# Altium PCB ZYNQ7020_AD9364.PcbDoc (part 2 of 3)
Units mil, origin at the board's own origin, x right, y up, seen from the top; angles counter-clockwise.
Board outline 6000 x 4000 mil, 4 copper layers (Top Layer, Layer 1, Layer 2, Bottom Layer), stack 13.912 mil thick; 188 components, 275 nets, 1212 pads, 269 vias.
Unrouted connection lines stored in the file: 735.
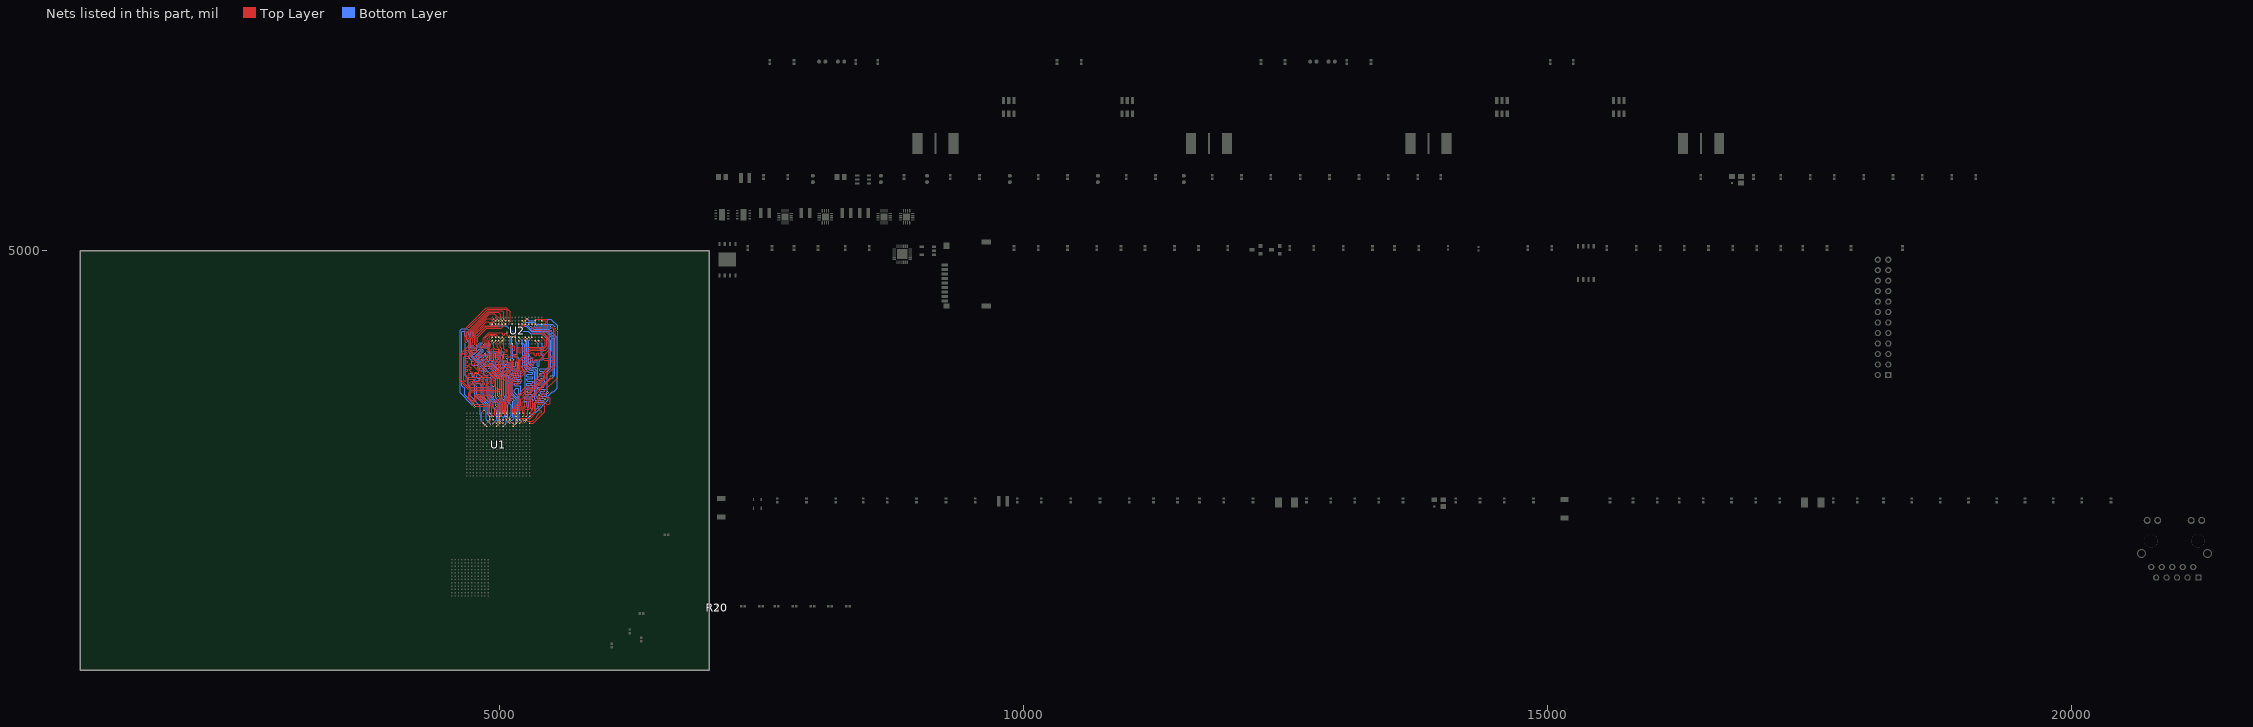
[diagram p3: the nets of this part, all layers, seen from the top]

## Via types
v1: diameter 17.72, hole 7.87, Top Layer to Bottom Layer, tented both sides, 129 vias
v2: diameter 16, hole 10, Top Layer to Bottom Layer, 124 vias
v3: diameter 19.68, hole 11.81, Top Layer to Bottom Layer, 16 vias

## Nets (pads, with @x,y where several pads share a name; then routed paths per layer and width w, separated by ;. In a path a pad name is that pad's centre, name@x,y a point inside that pad or via, vN(x,y) a via of type N, cw(c..) or ccw(c..) an arc to the next point about the centre after c; other vN are vias at no path point) (continued)
DDR3_A0: U1.N2 U2.N3 | length 1612.3
  Top Layer w6: v2(4763.34,3514.71) 4764.33,3515.7 4878.5,3515.7 4894.26,3502.54 4894.26,3434.54 U1.N2@4908.13,3419.29 ; v2(4783.92,4188.85) 4868.56,4273.49 4997.5,4273.49 5027.03,4303.02 5025.06,4303.02 v2(5011.28,4316.8)
  Bottom Layer w6: v2@4764.33,3517.66 4764.33,3532.43 4667.87,3628.88 4667.87,3686.78 4642.18,3712.47 4642.18,4228.22 4646.12,4232.15 4662.85,4232.15 4668.76,4226.25 4668.76,4190.82 4672.7,4186.88 4681.55,4186.88 4687.46,4192.78 4687.46,4221.33 4693.37,4227.23 4703.21,4227.23 4708.13,4222.31 4708.13,4192.78 4714.03,4186.88 4723.88,4186.88 4728.8,4191.8 4728.8,4221.33 4733.72,4226.25 4746.52,4226.25 4749.47,4223.3 4749.47,4194.75 4756.36,4187.86 v2@4781.95,4187.86
DDR3_A1: U1.K2 U2.P7 | length 1564.4
  Top Layer w6: v2(4888.23,3879.21) 4877.4,3879.21 4853.78,3855.59 4853.78,3828.03 4850.83,3825.08 4835.08,3825.08 4828.19,3831.97 4828.19,3854.6 4861.65,3888.07 4861.65,3897.91 4855.75,3903.82 4843.94,3903.82 4811.46,3871.34 4802.6,3871.34 4794.73,3879.21 4794.73,3888.07 4827.21,3920.55 4827.21,3932.36 4821.3,3938.27 4811.46,3938.27 4780.95,3907.75 4770.12,3907.75 4762.25,3915.63 4762.25,3922.52 4791.77,3952.05 4791.77,3961.89 4786.85,3966.81 4776.03,3966.81 4753.39,3944.17 4741.58,3944.17 4734.69,3951.06 4734.69,3960.9 4768.15,3994.37 4784.88,3994.37 4819.33,4028.82 4819.33,4091.81 4823.27,4095.75 4853.78,4095.75 4867.56,4109.53 4867.56,4169.57 4902.01,4204.01 4966.97,4204.01 v2(5011.26,4159.72) ; U1.K2@5003.09,3419.29 5019.25,3435.45 5019.25,3614.12 v2(5004.48,3628.88)
  Bottom Layer w6: v2(4888.23,3879.21) 4918.74,3879.21 5004.37,3793.58 5004.37,3732.34 5004.48,3732.23 v2(5004.48,3628.88) ; v2(5011.26,4159.72) v2@5011.26,4160.71
DDR3_A2: U1.M3 U2.P3 | length 1620.5
  Top Layer w6: 4711.08,3810.89 4709.11,3808.93 ; v2@4714.03,3833.53 4714.03,3813.85 4709.11,3808.93 ; v2(4924.63,3402.29) 4939.29,3387.63 U1.M3@4939.65,3387.63 ; v2(4979.78,4316.8) 4993.56,4303.02 4995.53,4303.02 4976.83,4284.32 4853.8,4284.32 4762.26,4192.78 4762.26,4184.91 4778.01,4169.16 4778.01,4106.17 4789.82,4094.36 4789.82,4080.58 4782.93,4073.69 4762.26,4073.69 4758.33,4069.75 4758.33,4056.96 4761.28,4054 4778.01,4054 4782.93,4049.08 4782.93,4036.29 4779.98,4033.34 4762.26,4033.34 4702.22,3973.3 4679.59,3973.3 4672.7,3966.41 4672.7,3957.55 4678.6,3951.64 4693.37,3951.64 4698.29,3946.72 4698.29,3936.88 4692.38,3930.97 4679.59,3930.97 4672.7,3924.08 4672.7,3915.23 4677.62,3910.3 4691.4,3910.3 4697.3,3904.4 4697.3,3894.56 4691.4,3888.65 4677.62,3888.65 4672.7,3883.73 4672.7,3873.89 4677.62,3868.97 4692.38,3868.97 4697.3,3864.04 4697.3,3853.22 4693.37,3849.28 4677.62,3849.28 4672.7,3844.36 4672.7,3819.75 4683.52,3808.93 4709.11,3808.93
  Bottom Layer w6: v2@4718.96,3831.56 4734.7,3831.56 4739.63,3826.64 4739.63,3802.04 4743.56,3798.1 4754.39,3798.1 4760.29,3804 4760.29,3828.61 4765.22,3833.53 4794.74,3833.53 4844.94,3783.34 4844.94,3737.96 4844.9,3737.92 4844.9,3608 4908.88,3544.03 4908.88,3448.55 4925.61,3431.82 v2@4925.61,3403.28
  other v2: 4714.03,3832.55
DDR3_A3: U1.K3 U2.N2 | length 1674
  Top Layer w6: v2(4943.36,3713.34) 4942.37,3713.34 4913.83,3684.8 4698.28,3684.8 4627.41,3755.67 4627.41,4013.54 4713.04,4099.17 4713.04,4153.31 4702.21,4164.13 4702.21,4212.36 4903.99,4414.13 4988.63,4414.13 5011.27,4391.49 v2@5011.27,4349.17 ; v2(4944.31,3617.84) 4948.25,3613.91 4948.25,3559.77 4988.13,3521.32 4988.13,3404.32 U1.K3@5002.95,3387.63 ; v2(5010.38,4349.3) 5011.14,4349.3 v2@5011.27,4349.17 ; U2.N2@5027.02,4334.41 5012.25,4349.17 v2@5011.27,4349.17
  Bottom Layer w6: v2(4943.36,3713.34) 4943.36,3618.8 v2(4944.31,3617.84) ; v2@5009.3,4350.38 v2(5010.38,4349.3) v2@5011.27,4350.2
DDR3_A4: U1.M4 U2.P8 | length 1586
  Top Layer w6: v2(4783.9,3814.75) 4783.9,3839.35 4779.96,3843.29 4768.15,3843.29 4763.23,3838.37 4763.23,3818.68 4759.29,3814.75 4747.48,3814.75 4742.56,3819.67 4742.56,3843.29 4737.64,3848.21 4721.89,3848.21 4715.99,3854.12 4715.99,3863.96 4721.89,3869.86 4726.81,3869.86 4732.72,3875.77 4732.72,3885.61 4728.78,3889.55 4716.97,3889.55 4712.05,3894.47 4712.05,3915.14 4718.94,3922.03 4730.75,3922.03 4803.58,3849.2 4803.58,3827.54 4822.28,3808.84 4877.4,3808.84 4888.23,3819.67 4906.93,3819.67 4932.52,3794.08 4957.13,3794.08 5008.31,3845.26 5008.31,4050.97 4981.29,4077.99 4981.29,4126.22 v2(4979.77,4127.74) ; v2@4923.64,3339.15 4923.64,3340.03 v2(4924.3,3340.68) U1.M4@4939.65,3356.03 ; v2@4978.54,4126.51 4994.53,4142.5 U2.P8@4995.51,4142.5
  Bottom Layer w6: v2@4784.88,3812.78 4784.88,3789.16 4791.77,3782.27 4810.47,3782.27 4813.43,3779.31 4813.43,3762.58 4809.49,3758.64 4777.99,3758.64 4771.1,3751.75 4771.1,3740.93 4777.99,3734.04 4814.41,3734.04 4825,3723.45 4825,3607.08 4894.11,3537.97 4894.11,3433.63 4908.15,3419.6 4908.15,3407.15 4908.14,3356.84 v2(4924.3,3340.68)
DDR3_A5: U1.L1 U2.P2 | length 1580.2
  Top Layer w6: v2(4903,3714.33) 4888.24,3699.57 4703.2,3699.57 4643.16,3759.6 4643.16,4008.62 4654.97,4020.43 4662.84,4020.43 4676.62,4006.65 4686.47,4006.65 4692.37,4012.56 4692.37,4021.42 4678.59,4035.2 4678.59,4043.07 4686.47,4050.94 4693.36,4050.94 4713.04,4031.26 4720.91,4031.26 4726.82,4037.16 4726.82,4048.97 4709.1,4066.69 4709.1,4074.57 4727.8,4093.27 4727.8,4159.21 4716.98,4170.04 4716.98,4208.42 4906.94,4398.38 4952.21,4398.38 4979.77,4370.83 v2@4979.77,4348.19 ; v2(4964.87,3514.66) 4971.19,3508.34 U1.L1@4971.19,3451.67 ; v2@4978.79,4348.19 4992.57,4334.41 U2.P2@4995.52,4334.41
  Bottom Layer w6: v2(4903,3714.33) 4903.99,3713.34 4903.99,3649.64 4903.85,3649.5 4903.85,3610.13 4964.87,3549.11 v2(4964.87,3514.66)
  other v2: 4977.8,4348.19
DDR3_A6: U1.L4 U2.R8 | length 1608.4
  Top Layer w6: v2(4874.45,3839.35) 4906.93,3839.35 4936.46,3809.83 4953.19,3809.83 4993.54,3850.18 4993.54,3935.81 4987.64,3941.72 4973.86,3941.72 4967.95,3947.62 4967.95,3955.49 4974.84,3962.38 4985.67,3962.38 4993.54,3970.26 4993.54,3979.12 4988.62,3984.04 4974.84,3984.04 4968.94,3989.94 4968.94,4000.77 4973.86,4005.69 4988.62,4005.69 4993.54,4010.61 4993.54,4049 4982.72,4059.83 4962.05,4059.83 4945.15,4076.72 4945.15,4094.13 4947.28,4096.26 4947.28,4127.74 v2(4948.27,4128.72) 4962.05,4142.5 U2.R8@4964.02,4142.5 ; v2@4956.12,3370.64 4970.73,3356.03 U1.L4@4971.3,3356.03
  Bottom Layer w6: v2@4876.42,3836.4 4876.42,3843.29 4722.88,3996.83 4713.03,3996.83 4706.14,3989.94 4706.14,3981.09 4738.62,3948.61 4738.62,3914.16 4745.51,3907.27 4787.84,3907.27 4814.41,3880.69 4814.41,3861.01 4820.32,3855.1 4843.94,3855.1 4849.84,3849.2 4849.84,3822.62 4859.69,3812.78 4879.37,3812.78 4884.29,3807.86 4884.29,3777.35 ; 4884.27,3777.32 4884.27,3607.85 4940.37,3551.74 4940.37,3508.44 4975.81,3473 4975.81,3390.33 v2@4956.12,3370.64
  other v2: 4957.11,3368.67
DDR3_A7: U1.K4 U2.R2 | length 1567.5
  Top Layer w6: v2(4903,3798.97) 4899.06,3795.04 4690.4,3795.04 4682.53,3787.16 4682.53,3757.64 4678.59,3753.7 4668.75,3753.7 4657.92,3764.53 4657.92,3984.01 4667.77,3993.86 4702.21,3993.86 4742.57,4034.21 4742.57,4121.81 4747.49,4126.73 4747.49,4149.37 4741.58,4155.27 4741.58,4164.13 4732.73,4172.99 4732.73,4202.52 4879.63,4349.42 4925.47,4349.42 4925.73,4349.17 v2(4947.29,4349.17) 4962.06,4334.41 U2.R2@4964.03,4334.41 ; v2(4986.63,3370.64) 4988.34,3370.64 U1.K4@5002.95,3356.03
  Bottom Layer w6: v2@4905.95,3796.02 4918.66,3783.31 4922.66,3779.32 4922.66,3695.47 4922.77,3695.36 4922.77,3679.78 4922.66,3679.67 4922.66,3656.1 4922.77,3655.99 4922.77,3640.41 4922.66,3640.3 4922.66,3610.8 4987.62,3545.84 4987.62,3371.63 v2(4986.63,3370.64)
DDR3_A8: U1.K1 U2.T8 | length 1586.6
  Top Layer w6: v2@4913.82,3859.04 4921.69,3851.16 4930.55,3851.16 4936.46,3845.26 4936.46,3828.53 4940.4,3824.59 4950.24,3824.59 4953.19,3827.54 4953.19,3845.26 4958.11,3850.18 4974.84,3850.18 4978.78,3854.12 4978.78,3869.86 4972.88,3875.77 4911.85,3875.77 4907.91,3879.71 4907.91,3890.53 4910.87,3893.49 4971.89,3893.49 4976.81,3898.41 4976.81,3909.24 4972.88,3913.17 4916.77,3913.17 4911.85,3918.09 4911.85,3928.92 4916.77,3933.84 4945.32,3933.84 4952.21,3940.73 4952.21,3951.56 4947.28,3956.48 4880.36,3956.48 4878.39,3958.45 4873.47,3963.37 4873.47,3970.26 4881.34,3978.13 4948.27,3978.13 4952.21,3982.07 4952.21,3995.85 4949.25,3998.8 4879.37,3998.8 4874.45,4003.72 4874.45,4011.6 4882.32,4019.47 4973.86,4019.47 4977.8,4023.41 4977.8,4036.2 4972.88,4041.12 4949.25,4041.12 4947.28,4043.09 4947.28,4055.89 4938.43,4064.75 4928.58,4064.75 4922.68,4058.84 4922.68,4039.16 4917.76,4034.24 4904.96,4034.24 4898.07,4041.12 4898.07,4064.75 4912.67,4079.35 4912.67,4122.65 4913.82,4123.8 4913.82,4125.77 v2(4915.79,4127.74) 4930.55,4142.5 U2.T8@4932.52,4142.5 ; v2(4983.57,3610.13) 4994.4,3610.13 5002.27,3602.26 5002.27,3588.48 4994.4,3580.6 4968.81,3580.6 4962.9,3574.7 4962.9,3567.81 4969.79,3560.92 4998.34,3560.92 5002.84,3556.41 U1.K1@5002.84,3451.67
  Bottom Layer w6: v2@4914.41,3858.45 4983.7,3789.16 4983.7,3687.78 4983.57,3687.65 v2(4983.57,3610.13)
  other v2: 4912.84,3860.02
DDR3_A9: U1.J4 U2.R3 | length 1582.6
  Top Layer w6: v2(4763.25,4094.36) 4763.25,4163.26 4747.5,4179 4747.5,4197.71 4873.48,4323.69 4892.18,4323.69 4898.34,4317.53 4914.56,4317.53 4914.81,4317.78 4947.3,4317.78 v2(4948.29,4316.8) 4962.07,4303.02 U2.R3@4964.04,4303.02 ; v2@5020.1,3369.66 5033.72,3356.03 U1.J4@5034.6,3356.03
  Bottom Layer w6: v2@4762.26,4092.39 4735.69,4092.39 4727.81,4084.52 4727.81,4076.64 4731.75,4072.71 4779,4072.71 4783.92,4067.78 4783.92,4056.96 4779,4052.04 4736.67,4052.04 4729.78,4045.15 4729.78,4035.3 4750.45,4014.63 4762.26,4014.63 4806.55,4058.93 4812.46,4058.93 4820.33,4051.05 4820.33,4044.16 4774.07,3997.9 4774.07,3987.08 4828.21,3932.94 4844.94,3932.94 4849.86,3928.02 4849.86,3912.27 4863.64,3898.49 4924.66,3898.49 5024.07,3799.08 5024.07,3725 5024.04,3724.96 5024.04,3597.02 5020.1,3593.08 5020.1,3426.74 5034.86,3411.98 5034.86,3385.41 v2@5018.13,3368.67 ; v2@4945.33,4316.8 v2@4945.33,4320.74
  other v2: 5019.11,3370.64
DDR3_A10: U1.F5 U2.L7 | length 1581.4
  Top Layer w6: v2(4847.88,4114.45) 4847.88,4167.6 4897.09,4216.81 5024.06,4216.81 5030.95,4209.92 5030.95,4199.09 5035.87,4194.17 5045.71,4194.17 5051.62,4200.08 5051.62,4209.92 5056.54,4214.84 5068.35,4214.84 v2(5073.27,4219.76) 5073.27,4192.2 U2.L7@5090,4175.47 ; U1.F5@5129.47,3324.91 5144.02,3339.47 v2(5145.01,3339.47)
  Bottom Layer w6: v2@4852.8,4113.46 4853.78,4112.48 4909.88,4112.48 4913.82,4108.54 4913.82,4098.7 4907.91,4092.79 4850.83,4092.79 4844.92,4086.89 4844.92,4078.03 4848.86,4074.09 4896.1,4074.09 4904.96,4065.23 4904.96,4043.58 4909.88,4038.66 5038.82,4038.66 5045.71,4031.77 5045.71,4020.94 5039.8,4015.04 5030.95,4015.04 5024.06,4008.15 5024.06,4004.21 5029.96,3998.31 5040.79,3998.31 5043.74,3995.35 5043.74,3981.57 5028.98,3966.81 5028.98,3923.5 5104.77,3847.72 5104.77,3688.27 5104.65,3688.16 5104.65,3638.68 5159.77,3583.56 5159.77,3353.25 v2@5145.01,3338.48 ; v2@5070.32,4220.75 v2@5070.32,4221.73
DDR3_A11: U1.G4 U2.R7 | length 1517.8
  Top Layer w6: v2(4858.7,4027.83) 4858.7,4016.02 4833.11,3990.43 4833.11,3977.64 4898.07,3912.68 4898.07,3901.85 4893.15,3896.93 4880.36,3896.93 4803.58,3973.7 4803.58,3989.45 4833.11,4018.97 4833.11,4072.12 4840.99,4080 4864.61,4080 4883.31,4098.7 4883.31,4160.71 v2(4902.01,4179.41) 4915.79,4193.19 4945.84,4193.19 U2.R7@4964.17,4174.87 ; v2(5082.11,3370.64) 5096.71,3356.03 U1.G4@5097.91,3356.03
  Bottom Layer w6: v2(4858.7,4027.83) 4869.53,4017.01 4869.53,3989.45 4875.43,3983.54 4887.25,3983.54 4889.21,3985.51 4889.21,4003.23 4895.12,4009.13 4902.99,4009.13 4909.88,4002.24 4909.88,3958.94 4897.09,3946.14 4897.09,3934.33 4902.99,3928.42 4933.51,3928.42 5063.43,3798.5 5063.43,3614.72 5074.23,3603.91 5074.23,3568.48 5114.59,3528.12 5114.59,3432.65 5097.85,3415.92 5097.85,3385.41 5083.09,3370.64 v2(5082.11,3370.64)
DDR3_A12: U1.E4 U2.N7 | length 1621.4
  Top Layer w6: U2.N7@5027.01,4175.47 5042.76,4159.72 5042.76,4095.74 5042.51,4095.48 5042.51,4082.23 5042.76,4081.98 5042.76,4065.23 5053.58,4054.41 5069.33,4054.41 5073.27,4050.47 5073.27,4037.68 5070.32,4034.72 5047.68,4034.72 5042.76,4029.8 5042.76,4019.96 5047.68,4015.04 5072.28,4015.04 5078.19,4009.13 5078.19,3998.31 5074.25,3994.37 5063.43,3994.37 5058.51,3989.45 v2(5058.51,3974.68) ; U1.E4@5161.21,3356.03 U1.E4@5162.01,3355.98 v2(5176.59,3370.64)
  Bottom Layer w6: v2(5042.76,4158.74) v2@5042.76,4160.71 ; v2@5061.46,3974.68 5073.27,3974.68 5079.17,3968.78 5079.17,3955.98 5076.22,3953.03 5047.68,3953.03 5043.74,3949.09 5043.74,3929.41 5060.47,3912.68 5069.33,3912.68 5074.25,3917.6 5074.25,3933.35 5079.17,3938.27 5090,3938.27 5093.94,3934.33 5093.94,3887.09 5097.88,3883.15 5108.7,3883.15 5114.61,3889.05 5114.61,3932.36 5120.51,3938.27 5128.39,3938.27 5134.29,3932.36 5134.29,3897.91 5138.23,3893.97 5147.09,3893.97 5153.98,3900.86 5153.98,3939.25 5157.91,3943.19 5166.77,3943.19 5173.66,3936.3 5173.66,3883.15 5164.8,3874.29 5123.47,3874.29 5118.54,3869.37 5118.54,3858.54 5123.47,3853.62 5174.65,3853.62 5180.55,3847.72 5180.55,3838.86 5174.65,3832.95 5123.47,3832.95 5119.53,3829.01 5119.53,3818.19 5123.47,3814.25 5185.47,3814.25 5188.43,3811.3 5188.43,3797.52 5184.49,3793.58 5131.34,3793.58 5123.47,3785.71 5123.47,3640.31 5176.59,3587.18 v2(5176.59,3370.64)
DDR3_A13: U1.D4 U2.T3 | length 1611.2
  Top Layer w6: v2@4912.85,4301.05 v2(4914.82,4301.05) 4930.57,4301.05 U2.T3@4932.54,4303.02 ; U1.D4@5192.86,3356.03 U1.D4@5193.5,3355.98 v2(5208.09,3370.64)
  Bottom Layer w6: v2@4914.33,4300.56 4929.59,4285.3 5067.38,4285.3 5154,4198.69 5154,4132.74 5168.76,4117.98 5168.76,4015.62 5164.82,4011.68 5147.11,4011.68 5144.15,4008.73 5144.15,3994.95 5151.04,3988.06 5168.76,3988.06 5189.43,3967.39 5189.43,3860.11 5204.19,3845.34 5204.19,3781.37 5198.29,3775.46 5152.03,3775.46 5143.17,3766.6 5143.17,3759.71 5149.07,3753.81 5200.26,3753.81 5204.19,3749.87 5204.19,3739.04 5199.27,3734.12 5152.03,3734.12 5145.14,3727.23 5145.14,3717.39 5149.07,3713.45 5198.29,3713.45 5203.21,3708.53 5203.21,3630.78 5201.24,3628.81 5188.44,3628.81 5182.54,3634.71 5182.54,3680.97 5175.65,3687.86 5161.38,3687.86 5144.11,3670.6 5144.11,3649.19 5190.37,3602.93 5190.37,3388.36 v2(5208.09,3370.64)
DDR3_A14: U1.F4 U2.T7 | length 1589.4
  Top Layer w6: v2(4878.39,4055.39) 4878.39,4070.16 4897.09,4088.86 4897.09,4142.01 v2(4915.79,4160.71) 4930.55,4175.47 U2.T7@4932.52,4175.47 ; v2(5114.59,3370.64) 5114.95,3370.64 U1.F4@5129.56,3356.03
  Bottom Layer w6: v2@4879.37,4053.42 4879.37,4048.5 4904.96,4022.91 4918.74,4022.91 4923.66,4017.99 4923.66,3951.06 4929.57,3945.16 4940.4,3945.16 4945.32,3950.08 4945.32,4014.05 4953.19,4021.93 4962.05,4021.93 4966.97,4017.01 4966.97,3963.86 4970.91,3959.92 4982.72,3959.92 4988.62,3965.83 4988.62,4018.97 4994.53,4024.88 5004.37,4024.88 5009.29,4019.96 5009.29,3947.12 5005.36,3943.19 4963.03,3943.19 4959.1,3939.25 4959.1,3923.5 4964.02,3918.58 5009.29,3918.58 5015.2,3912.68 5015.2,3902.83 5001.42,3889.05 5001.42,3882.16 5009.29,3874.29 5015.2,3874.29 5032.91,3892.01 5041.77,3892.01 5047.68,3886.1 5047.68,3877.24 5030.95,3860.51 5030.95,3850.67 5035.87,3845.75 5045.71,3845.75 5061.46,3861.49 5071.3,3861.49 5079.17,3853.62 5079.17,3848.7 5060.47,3830 5060.47,3822.12 5069.33,3813.27 5085.08,3813.27 5090,3808.35 5090,3783.74 5084.1,3777.83 5084.1,3737.79 ; v2@4914.8,4159.72 v2(4915.79,4160.71) ; 5084.07,3737.77 5084.07,3635.41 5101.79,3617.69 5101.79,3606.86 5089.98,3595.05 5089.98,3573.4 5095.89,3567.49 5101.79,3567.49 5103.76,3569.46 5103.76,3583.24 5113.6,3593.08 5125.41,3593.08 5144.11,3574.38 5144.11,3402.14 v2@5115.57,3373.6
DDR3_BA0: U1.L5 U2.M2 | length 1583
  Top Layer w6: v2(4692.37,4143.46) 4686.47,4149.37 4686.47,4217.28 4897.1,4427.91 5028.99,4427.91 5042.77,4414.13 v2(5042.77,4349.17) 5057.53,4334.41 U2.M2@5058.51,4334.41 ; U1.L5@4971.21,3324.91 4971.99,3324.91 v2(4987.53,3340.45)
  Bottom Layer w6: v2@4690.4,4142.48 4708.12,4142.48 4713.04,4137.56 4713.04,4028.31 4963.04,3778.31 4963.04,3777.32 4963.91,3776.46 4963.91,3597.34 5002.54,3558.7 5002.54,3355.47 v2(4987.53,3340.45)
DDR3_BA1: U1.R4 U2.N8 | length 1562.7
  Top Layer w6: v2(4768.15,3774.39) 4703.19,3774.39 4697.28,3768.49 4697.28,3729.12 4707.13,3719.27 4719.92,3719.27 4722.88,3722.23 4722.88,3744.86 4731.73,3753.72 4803.58,3753.72 4809.49,3759.63 4809.49,3774.39 4813.43,3778.33 4821.3,3778.33 4827.21,3772.42 4827.21,3757.66 4830.16,3754.71 4840,3754.71 4846.89,3761.6 4846.89,3773.41 4853.78,3780.3 4861.65,3780.3 4868.54,3773.41 4868.54,3755.69 4873.47,3750.77 4884.29,3750.77 4888.23,3754.71 4888.23,3774.39 4893.15,3779.31 4964.02,3779.31 5034.88,3850.18 5034.88,3859.04 5027.01,3866.91 5027.01,3876.75 5039.8,3889.55 5073.27,3889.55 5078.19,3894.47 5078.19,3905.3 5073.27,3910.22 5027.99,3910.22 5023.07,3915.14 5023.07,3924.98 5028.98,3930.89 5057.52,3930.89 5064.41,3937.78 5064.41,3945.65 5058.51,3951.56 5042.76,3951.56 5033.9,3960.42 5033.9,4002.74 5023.07,4013.57 5023.07,4068.68 5010.12,4081.64 5010.12,4127.58 v2(5011.26,4128.72) 5013.23,4128.72 U2.N8@5027.01,4142.5 ; U1.R4@4844.7,3356.03 4831.13,3371.17 4831.13,3460.17 4848.84,3479.89 v2(4853.76,3479.89)
  Bottom Layer w6: v2(4768.15,3774.39) 4744.51,3750.75 4744.51,3736.78 4763.21,3718.08 4763.21,3623.59 4853.76,3533.04 v2(4853.76,3479.89) ; v2@5010.28,4128.72 v2(5011.26,4128.72)
DDR3_BA2: U1.J5 U2.M3 | length 1639.3
  Top Layer w6: v2(4798.68,4123.89) 4793.76,4128.81 4793.76,4174.08 4881.36,4261.68 5017.19,4261.68 5058.52,4303.02 5057.54,4303.02 v2(5042.78,4317.78) ; U1.J5@5034.51,3324.91 5035.96,3324.91 v2(5050.52,3339.47)
  Bottom Layer w6: v2@4802.62,4121.92 4826.24,4121.92 4829.19,4118.97 4829.19,4109.12 4823.29,4103.22 4789.82,4103.22 4783.92,4097.31 4783.92,4089.44 4789.82,4083.53 4825.26,4083.53 4829.19,4079.6 4829.19,4068.77 4844.94,4053.02 4844.94,4043.18 4796.71,3994.95 4796.71,3988.06 4805.57,3979.2 4811.48,3979.2 4840.02,4007.74 4849.86,4007.74 4856.75,4000.86 4856.75,3989.04 4834.11,3966.41 4834.11,3960.5 4841.99,3952.63 4851.83,3952.63 4869.55,3970.34 4880.37,3970.34 4887.26,3963.45 4887.26,3952.63 4864.63,3929.99 4864.63,3918.18 4870.53,3912.27 4930.57,3912.27 5043.76,3799.08 5043.76,3778.41 5043.63,3778.29 5043.63,3615.06 5056.43,3602.26 5056.43,3556.99 5063.32,3550.1 5063.32,3512.69 5056.43,3505.8 5056.43,3477.26 5066.27,3467.42 5066.27,3355.21 v2@5048.55,3337.5
DDR3_CAS: U1.P5 U2.K3 | length 1669.7
  Top Layer w6: v2(4678.6,4121.92) 4672.7,4127.82 4672.7,4253.81 4875.45,4456.56 5065.41,4456.56 5105.77,4416.21 5105.77,4317.78 5120.53,4303.02 U2.K3@5121.52,4303.02 ; v2(4862.53,3339.47) 4862.53,3338.64 U1.P5@4876.26,3324.91
  Bottom Layer w6: v2@4675.65,4119.95 4672.7,4117 4672.7,3806.96 4702.22,3777.43 4702.1,3777.3 4702.1,3719.39 4722.76,3698.72 4722.76,3615.06 4819.22,3518.6 4819.22,3436.91 4829.06,3427.06 4829.06,3371.95 4861.54,3339.47 v2@4861.54,3338.48
  other v2: 5104.78,4316.8
DDR3_CK_N: R20.2 U1.M2 U2.K7 | length 1532.1
  Top Layer w6: 4887.36,3594.44 4894.25,3594.44 4901.14,3601.32 4901.14,3616.09 4895.23,3621.99 4866.69,3621.99 4858.81,3614.12 4858.81,3573.77 4844.05,3559 4821.41,3559 4808.62,3571.8 4808.62,3613.14 4802.71,3619.04 4785,3619.04 4777.12,3611.17 4777.12,3574.75 4762.36,3559.99 4732.83,3559.99 4708.22,3584.59 4708.22,3644.63 4731.85,3668.25 4982.83,3668.25 5005.47,3690.89 5005.47,3771.6 5112.75,3878.88 5112.75,3948.77 v2(5102.91,3958.61) ; 4890.31,3590.5 4890.31,3583.61 4906.06,3567.86 4906.06,3535.38 4929.68,3511.76 4929.68,3488.14 4925.26,3481.54 4925.26,3436.54 U1.M2@4939.78,3419.29 ; v2@5104.88,4190.89 v2(5105.86,4190.89) U2.K7@5121.61,4175.14
  Bottom Layer w6: v2@5101.93,3958.61 5113.74,3970.42 5113.74,4092.47 5105.86,4100.34 v2(5105.86,4190.89)
DDR3_CK_P: R20.1 U1.L2 U2.J7 | length 1544.6
  Top Layer w6: 4926.73,3592.47 4926.73,3575.73 4917.87,3566.88 4917.87,3544.24 4943.46,3518.65 4943.46,3496.01 4956.51,3482.96 4956.51,3465.76 4956.26,3465.51 4956.26,3434.47 U1.L2@4971.43,3419.29 ; 4926.73,3594.44 4912.95,3608.21 4912.95,3621.99 4899.17,3635.77 4860.78,3635.77 4846.02,3621.01 4846.02,3577.7 4839.13,3570.81 4829.29,3570.81 4823.38,3576.72 4823.38,3618.06 4808.62,3632.82 4778.11,3632.82 4763.34,3618.06 4763.34,3579.67 4756.45,3572.78 4738.74,3572.78 4721.02,3590.5 4721.02,3638.73 4736.77,3654.47 4988.74,3654.47 5018.26,3684 5018.26,3765.7 5126.53,3873.96 5126.53,3947.78 v2(5138.34,3959.59) ; v2@5137.36,4191.88 5137.36,4190.89 U2.J7@5153.11,4175.14
  Bottom Layer w6: v2@5136.37,4188.92 5118.66,4171.21 5118.66,4106.25 5126.53,4098.37 5126.53,3971.4 v2(5138.34,3959.59)
  other v2: 5136.37,4189.91
DDR3_CKE: U1.N3 U2.K9 | length 1602.9
  Top Layer w6: v2@4783.92,3719.57 4742.58,3719.57 4738.64,3723.51 4738.64,3732.37 4745.53,3739.26 4815.41,3739.26 4818.37,3736.3 4818.37,3720.55 4824.27,3714.65 4834.11,3714.65 4839.03,3719.57 4839.03,3735.32 4844.94,3741.22 4853.8,3741.22 4858.72,3736.3 4858.72,3719.57 4863.64,3714.65 4875.45,3714.65 4879.39,3718.59 4879.39,3726.46 4888.25,3735.32 4898.09,3735.32 4904,3741.22 4904,3754.02 4909.9,3759.93 4918.76,3759.93 4921.71,3756.97 4921.71,3743.19 4930.57,3734.33 4937.46,3734.33 4943.37,3740.24 4943.37,3760.91 4947.3,3764.85 4959.11,3764.85 4963.05,3760.91 4963.05,3699.89 4967.97,3694.96 4978.8,3694.96 4983.72,3699.89 4983.72,3779.61 5093.96,3889.85 5093.96,3928.23 5079.19,3943 5079.19,3981.38 5088.05,3990.24 5149.07,3990.24 5153.01,3994.18 5153.01,4003.04 5144.15,4011.89 5118.56,4011.89 5111.67,4018.78 5111.67,4044.37 5119.55,4052.25 5144.15,4052.25 5149.07,4057.17 5149.07,4090.63 5144.15,4095.55 5136.28,4095.55 5129.39,4088.67 5129.39,4078.82 5124.47,4073.9 5099.86,4073.9 5093.96,4079.81 v2(5093.96,4084.73) U2.K9@5121.52,4112.29 ; v2@4893,3370.44 U1.N3@4907.87,3385.31
  Bottom Layer w6: v2@4783.92,3715.63 4783.92,3687.09 4783.75,3686.92 4783.75,3625.36 4874.3,3534.81 4874.3,3387.17 v2@4889.56,3371.92
  other v2: 4892,3372 4783.92,3717.6
DDR3_CS: U1.N1 U2.L2 | length 1624
  Top Layer w6: v2(4703.2,4258.62) 4887.25,4442.68 5058.51,4442.68 5075,4426.19 5075,4347.45 5088.04,4334.41 U2.L2@5090.01,4334.41 ; v2(4738.49,3534.34) 4740.46,3536.31 4879.24,3536.31 4907.89,3507.66 U1.N1@4907.89,3451.67
  Bottom Layer w6: v2(4703.2,4258.62) 4701.23,4256.65 4641.19,4256.65 4627.41,4242.87 4627.41,3644.44 4733.57,3538.28 v2@4734.56,3538.28
  other v2: 5075.25,4347.2
DDR3_DM0: U1.A1 U2.E7 | length 1291.7
  Top Layer w6: U2.E7@5279.13,4174.87 5293.89,4160.1 v2(5294.87,4160.1) ; U1.A1@5287.99,3450.47 5319.48,3481.95 5319.48,3564.63 v2(5378.54,3623.68)
  Bottom Layer w6: v2@5293.89,4156.16 5279.13,4141.4 5279.13,3923.88 5314.56,3888.45 5350.98,3888.45 5365.74,3873.68 5365.74,3774.27 5373.61,3766.4 5421.84,3766.4 5430.7,3757.54 5430.7,3749.67 5423.81,3742.78 5372.63,3742.78 5365.74,3735.89 5365.74,3726.05 5370.66,3721.12 5421.84,3721.12 5428.73,3714.24 5428.73,3705.38 5422.83,3699.47 5371.65,3699.47 5366.72,3694.55 5366.72,3682.74 5371.65,3677.82 5430.7,3677.82 5434.64,3673.88 5434.64,3663.05 5430.7,3659.12 5397.24,3659.12 5390.35,3652.23 5390.35,3642.38 5395.27,3637.46 5443.5,3637.46 5451.37,3629.59 5451.37,3617.78 5446.45,3612.86 5389.36,3612.86 v2(5378.54,3623.68)
DDR3_DM1: U1.F1 U2.D3 | length 1265.2
  Top Layer w6: U1.F1@5130,3450.53 5130,3495.03 5174.09,3539.12 5174.09,3623.76 5250.86,3700.53 5280.39,3700.53 5473.3,3893.45 5473.3,3949.55 5467.39,3955.45 5429.99,3955.45 5424.09,3961.36 5424.09,3971.2 5428.02,3975.14 5466.41,3975.14 5473.3,3982.03 5473.3,4023.37 5497.91,4047.97 v2@5497.91,4246.79 ; U2.D3@5310.9,4302.9 5325.66,4288.13 v2(5325.66,4285.18)
  Bottom Layer w6: v2(5325.66,4285.18) 5328.61,4285.18 5348.3,4265.49 5484.13,4265.49 v2@5500.86,4248.76
  other v2: 5499.87,4247.78
DDR3_DQ0: U1.C3 U2.E3 | length 1299.4
  Top Layer w6: U1.C3@5224.51,3387.63 5240.37,3371.78 v2(5240.57,3371.78) ; U2.E3@5278.96,4302.88 5278.96,4301.9 v2(5294.71,4286.15)
  Bottom Layer w6: v2@5243.53,3373.75 5244.51,3373.75 5337.03,3466.27 5357.7,3466.27 5467.93,3576.51 5467.93,3617.84 5504.35,3654.26 5521.08,3654.26 5553.56,3686.74 5553.56,4169.03 5468.92,4253.67 5327.19,4253.67 v2(5294.71,4286.15)
DDR3_DQ1: U1.B3 U2.F7 | length 1281.7
  Top Layer w6: U2.F7@5247.46,4174.93 5262.23,4160.17 v2(5263.21,4160.17) ; U1.B3@5256.17,3387.63 5272.02,3371.78 5314.39,3371.78 5354.75,3412.14 5354.75,3420.01 5387.23,3452.49 5397.07,3452.49 5403.96,3459.38 5403.96,3471.19 5400.02,3475.13 5386.24,3475.13 5364.59,3496.78 5364.59,3530.25 5403.96,3569.62 5418.72,3569.62 5453.17,3535.17 5471.87,3535.17 5483.68,3546.98 5483.68,3596.19 5475.81,3604.06 5453.17,3604.06 5434.47,3585.36 v2(5434.47,3584.38)
  Bottom Layer w6: v2(5263.21,4160.17) 5268.13,4155.25 5268.13,3904.26 5299.63,3872.77 5337.03,3872.77 5350.81,3858.99 5350.81,3607.02 5364.59,3593.24 5425.61,3593.24 v2(5434.47,3584.38)
DDR3_DQ2: U1.A2 U2.F2 | length 1322.9
  Top Layer w6: U1.A2@5287.95,3419.29 5287.95,3424.16 5335.19,3471.4 5335.19,3551.13 5418.85,3634.79 5418.85,3654.47 5555,3790.62 5555,4236.83 v2(5553.7,4238.14)
  Top Layer w12: U2.F2@5247.59,4334.59 v2@5263.34,4350.34
  Bottom Layer w6: v2@5265.31,4349.36 5284.01,4330.66 5333.22,4330.66 5347.99,4345.42 5491.69,4345.42 5554.68,4282.43 v2@5554.68,4241.09
  other v2: 5264.33,4349.36
DDR3_DQ3: U1.A4 U2.F8 | length 1283.4
  Top Layer w6: v2(5232.7,4160.01) 5247.46,4145.25 U2.F8@5247.46,4142.3 ; U1.A4@5287.82,3356.03 5324.39,3356.03 5434.47,3466.11 5434.47,3517.3 5411.83,3539.93 5399.04,3539.93 v2(5384.27,3525.17)
  Bottom Layer w6: v2@5235.65,4157.06 5255.33,4137.37 5255.33,3892.3 5288.8,3858.83 5320.3,3858.83 5336.04,3843.08 5336.04,3579.3 5340.96,3574.38 5419.7,3574.38 5425.61,3568.48 5425.61,3559.62 5418.72,3552.73 5341.95,3552.73 5335.06,3545.84 5335.06,3499.58 5341.95,3492.69 5354.74,3492.69 5384.27,3522.22 v2(5384.27,3525.17)
DDR3_DQ4: U1.D3 U2.H3 | length 1328.7
  Top Layer w6: U2.H3@5184.47,4302.88 5184.47,4263.51 v2(5199.23,4248.75) ; U1.D3@5192.86,3387.63 5208.51,3403.28 5298.64,3403.28 5348.84,3453.47 5348.84,3539.1 5457.11,3647.37 v2(5459.08,3647.37)
  Bottom Layer w6: v2(5199.23,4248.75) 5214.98,4233 5276.01,4233 5300.61,4208.4 5424.63,4208.4 5489.59,4143.43 5489.59,3878.67 5459.08,3848.16 5459.08,3648.36 v2@5461.05,3646.39
DDR3_DQ5: U1.D1 U2.H8 | length 1283.6
  Top Layer w6: U2.H8@5184.91,4142.46 5185.9,4142.46 v2(5200.66,4127.7) ; U1.D1@5193.31,3450.53 5193.31,3472.71 5240.03,3519.43 v2(5240.03,3548.96)
  Bottom Layer w6: v2@5201.65,4129.67 5201.65,4120.81 5224.28,4098.17 5224.28,3869.82 5245.94,3848.17 5245.94,3634.59 5250.86,3629.67 5314.83,3629.67 5320.74,3623.76 5320.74,3611.95 5315.82,3607.03 5239.05,3607.03 5235.11,3603.09 5235.11,3592.27 5239.05,3588.33 5309.91,3588.33 5320.74,3577.5 5320.74,3494.82 5314.83,3488.92 5306.96,3488.92 5299.09,3496.79 5299.09,3559.79 5293.18,3565.69 5288.26,3565.69 5280.39,3557.82 5280.39,3513.53 5275.46,3508.6 5267.59,3508.6 5260.7,3515.49 5260.7,3561.75 5256.76,3565.69 5246.92,3565.69 5240.03,3558.8 v2(5240.03,3548.96)
DDR3_DQ6: U1.C1 U2.G2 | length 1293.7
  Top Layer w6: U2.G2@5216.41,4334.39 v2(5233.14,4317.66) ; U1.C1@5225,3450.47 5224.96,3484.67 5265.62,3525.34 5265.62,3610.97 5448.69,3794.04 5448.69,3814.71 5533.34,3899.35 v2(5533.34,4267.46)
  Bottom Layer w6: v2(5233.14,4317.66) 5336.49,4317.66 5353.22,4300.93 5502.83,4300.93 v2@5537.28,4266.48
DDR3_DQ7: U1.E1 U2.H7 | length 1330.2
  Top Layer w6: U1.E1@5161.65,3450.53 5161.65,3481.41 5204.6,3524.35 5204.6,3584.39 5209.52,3589.31 5225.27,3589.31 5230.19,3594.23 5230.19,3604.08 5222.32,3611.95 5222.32,3617.86 5258.73,3654.27 v2(5263.65,3654.27) ; U2.H7@5184.91,4174.94 5185.9,4174.94 v2(5200.66,4160.18)
  Bottom Layer w6: v2(5200.66,4160.18) 5216.66,4144.18 5216.66,4121.55 5226.51,4111.7 5227.49,4111.7 5240.03,4099.16 5240.03,3883.6 5280.39,3843.25 5312.87,3843.25 5320.74,3835.38 5320.74,3825.53 5315.82,3820.61 5267.59,3820.61 5260.7,3813.72 5260.7,3803.88 5265.62,3798.96 5314.83,3798.96 5320.74,3793.05 5320.74,3785.18 5314.83,3779.27 5267.59,3779.27 5260.7,3772.38 5260.7,3764.51 5268.57,3756.64 5313.85,3756.64 5319.76,3750.73 5319.76,3742.86 5311.88,3734.98 5266.61,3734.98 5261.69,3730.06 5261.69,3719.23 5265.62,3715.3 5314.83,3715.3 5319.76,3710.38 5319.76,3698.57 5314.83,3693.64 5265.62,3693.64 5260.7,3688.72 5260.7,3679.86 5267.59,3672.97 5313.85,3672.97 5315.82,3671.01 5315.82,3658.21 5309.91,3652.31 5265.62,3652.31 v2(5263.65,3654.27)
DDR3_DQ8: U1.E2 U2.D7 | length 1288.5
  Top Layer w6: U1.E2@5161.34,3419.29 5159.94,3419.29 5145.23,3434 5145.23,3486.17 5189.52,3530.46 5189.52,3610.18 5265.31,3685.97 5294.84,3685.97 5393.26,3784.4 v2(5393.26,3785.38) ; U2.D7@5310.59,4175.14 5310.59,4206.64 5318.46,4214.51 5394.25,4214.51 v2(5423.78,4184.99)
  Bottom Layer w6: v2(5393.26,3785.38) 5396.22,3782.43 5419.84,3782.43 5428.7,3791.29 5428.7,3802.11 5421.81,3809 5391.3,3809 5384.41,3815.89 5384.41,3825.73 5392.28,3833.61 5420.82,3833.61 5425.74,3838.53 5425.74,3846.4 5419.84,3852.31 5389.33,3852.31 5384.41,3857.23 5384.41,3866.09 5391.3,3872.98 5460.19,3872.98 5474.96,3887.74 5474.96,4137.74 5429.68,4183.02 v2@5428.7,4183.02
DDR3_DQ9: U1.E3 U2.C3 | length 1288.3
  Top Layer w6: U1.E3@5161.21,3387.63 5176.6,3403.02 5176.6,3476.11 5218.92,3518.43 5218.92,3555.84 5246.48,3583.4 5246.48,3611.94 5433.49,3798.95 5433.49,3829.46 5519.12,3915.09 5519.12,3930.84 5514.19,3935.76 5500.42,3935.76 5493.53,3942.65 5493.53,3951.51 5499.43,3957.41 5513.21,3957.41 5519.12,3963.32 5519.12,3973.16 5513.21,3979.06 5498.45,3979.06 5493.53,3983.99 5493.53,3992.84 5499.43,3998.75 5512.23,3998.75 5518.13,4004.66 5518.13,4253.67 v2@5493.53,4278.28 ; U2.C3@5341.95,4302.88 5341.95,4300.91 v2@5357.7,4285.17
  Bottom Layer w6: v2@5357.7,4285.17 5488.6,4285.17 v2(5495.49,4278.28)
  other v2: 5357.7,4284.18
DDR3_DQ10: U1.G3 U2.C8 | length 1305.6
  Top Layer w6: U1.G3@5097.91,3387.63 5112.57,3402.29 v2(5113.6,3402.29) ; v2@5125.42,3570.6 v2(5124.43,3570.6) 5124.43,3715.29 5144.12,3734.97 5153.96,3734.97 5166.75,3722.17 5176.6,3722.17 5182.5,3728.08 5182.5,3736.94 5168.72,3750.72 5168.72,3758.59 5175.61,3765.48 5183.49,3765.48 5197.27,3751.7 5207.11,3751.7 5213.01,3757.61 5213.01,3766.47 5197.27,3782.21 5197.27,3787.14 5324.23,3914.1 v2(5329.16,3914.1) ; U2.C8@5341.95,4142.45 5342.93,4142.45 v2(5357.7,4127.69)
  Bottom Layer w6: v2(5113.6,3402.29) 5129.35,3418.04 5129.35,3563.71 v2@5126.4,3566.66 ; v2@5325.22,3914.1 5313.41,3914.1 5300.61,3926.9 5300.61,3971.19 5307.5,3978.08 5316.36,3978.08 5320.3,3974.14 5320.3,3935.76 5322.27,3933.79 5338.01,3933.79 5339.98,3935.76 5339.98,3952.49 5345.89,3958.4 5355.73,3958.4 5360.65,3953.47 5360.65,3903.28 5365.57,3898.36 5375.42,3898.36 5379.35,3902.29 5379.35,3947.57 5390.18,3958.4 5410.85,3958.4 5419.71,3967.25 5419.71,4000.72 5413.8,4006.62 5404.94,4006.62 5399.04,4012.53 5399.04,4058.79 5372.46,4085.36 5372.46,4113.91 5358.68,4127.69 v2(5357.7,4127.69)
DDR3_DQ11: U1.H3 U2.C2 | length 1290.7
  Top Layer w6: U1.H3@5066.26,3387.63 5066.46,3387.63 v2@5081.12,3402.29 ; v2@5083.09,3534.18 v2(5084.08,3535.17) 5104.75,3555.84 5104.75,3721.19 5342.93,3959.38 5383.29,3959.38 5482.7,4058.79 5482.7,4228.08 5463.01,4247.77 5463.01,4338.32 5452.19,4349.14 5356.71,4349.14 U2.C2@5341.95,4334.38
  Bottom Layer w6: v2@5080.14,3400.32 v2(5082.11,3402.29) 5082.11,3465.3 5081.86,3465.55 5081.86,3532.95 v2(5084.08,3535.17)
DDR3_DQ12: U1.J3 U2.A7 | length 1286.7
  Top Layer w6: U1.J3@5034.61,3387.63 5035.95,3387.63 v2(5050.61,3402.29) ; v2(5038.8,3589.3) 5038.8,3754.66 5168.72,3884.58 5168.72,4072.57 5174.63,4078.47 5184.47,4078.47 5189.39,4073.55 5189.39,4028.28 5192.34,4025.32 5204.16,4025.32 5209.08,4030.25 5209.08,4074.54 5214.98,4080.44 5220.89,4080.44 5227.78,4073.55 5227.78,4042.06 5232.7,4037.14 5242.54,4037.14 5248.45,4043.04 5248.45,4072.57 5255.34,4079.46 5419.71,4079.46 5438.41,4098.16 5438.41,4142.45 5405.93,4174.93 U2.A7@5404.94,4174.93
  Bottom Layer w6: v2@5038.8,3585.36 5038.8,3473.16 5050.61,3461.35 v2(5050.61,3402.29)
DDR3_DQ13: U1.H2 U2.A2 | length 1285
  Top Layer w6: U1.H2@5066.39,3419.29 5050.74,3434.94 5050.74,3556.05 5073.38,3578.69 5073.38,3739.12 5199.37,3865.1 5199.37,3949.75 5299.76,4050.14 5440.51,4050.14 5468.07,4077.7 5468.07,4204.67 5423.78,4248.96 5423.78,4262.74 5428.7,4267.66 5441.49,4267.66 5448.38,4274.55 5448.38,4285.38 5444.44,4289.32 5429.68,4289.32 5423.78,4295.22 5423.78,4304.08 5430.67,4310.97 5444.44,4310.97 5448.38,4314.91 5448.38,4325.73 5440.51,4333.61 U2.A2@5408.03,4333.61
DDR3_DQ14: U1.H1 U2.B8 | length 1300.3
  Top Layer w6: U1.H1@5066.7,3450.53 5066.7,3546.89 5088.46,3568.64 5088.46,3729.08 5224.28,3864.9 5224.28,3879.67 5214.44,3889.51 5214.44,3900.34 5220.35,3906.24 5228.22,3906.24 5241.02,3893.45 5253.81,3893.45 5257.75,3897.38 5257.75,3905.26 5223.3,3939.71 5223.3,3947.58 5231.17,3955.45 5238.06,3955.45 5272.51,3921.01 5282.35,3921.01 5288.26,3926.91 5288.26,3937.74 5250.86,3975.14 5250.86,3981.05 5257.75,3987.94 5266.61,3987.94 5302.04,3952.5 5311.88,3952.5 5317.79,3958.41 5317.79,3966.28 5292.2,3991.87 5292.2,4015.49 5305.98,4029.27 5327.63,4029.27 5334.52,4022.38 5334.52,4006.64 5341.41,3999.75 5352.24,3999.75 5356.17,4003.68 5356.17,4021.4 5364.05,4029.27 5370.94,4029.27 5376.84,4023.37 5376.84,4004.67 5381.76,3999.75 5391.61,3999.75 5397.51,4005.65 5397.51,4024.35 5401.45,4028.29 v2(5418.18,4028.29) ; U2.B8@5373.89,4142.46 5388.65,4127.7 v2(5389.64,4127.7)
  Bottom Layer w6: v2(5389.64,4127.7) 5391.61,4127.7 5407.35,4111.95 5407.35,4082.42 5420.15,4069.63 v2@5420.15,4030.26
DDR3_DQ15: U1.J1 U2.A3 | length 1294.5
  Top Layer w6: U1.J1@5034.49,3451.67 5034.49,3561.64 5059.36,3586.51 5059.36,3751.86 5183.37,3875.88 5183.37,3954.62 5293.61,4064.86 5422.55,4064.86 5453.06,4095.37 5453.06,4185.92 5394.99,4243.99 5313.3,4243.99 5308.37,4248.91 5308.37,4259.74 5314.28,4265.64 5396.96,4265.64 5404.83,4273.52 U2.A3@5404.83,4301.08
DDR3_DQS0_N: U1.B2 U2.G3 | length 1283.6
  Top Layer w6: v2(5206.26,4279.47) 5215.11,4279.47 5222,4286.36 5222,4297.19 U2.G3@5216.1,4303.1 ; U1.B2@5256.3,3419.29 5272.2,3435.19 5272.2,3477.31 5299.76,3504.87 5299.76,3585.58 5496.61,3782.43 v2(5510.39,3782.43)
  Bottom Layer w6: v2(5206.26,4279.47) 5215.11,4279.47 5228.89,4293.25 5259.41,4293.25 5313.54,4239.12 5455.27,4239.12 5529.09,4165.3 5529.09,3814.91 5512.36,3798.18 v2@5512.36,3784.4
DDR3_DQS0_P: U1.C2 U2.F3 | length 1286.6
  Top Layer w6: U1.C2@5224.65,3419.29 5239.72,3434.36 5239.72,3459.6 5239.47,3459.86 5239.47,3478.04 5251.53,3490.1 5264.33,3490.1 5286.96,3512.74 5286.96,3591.48 5484.8,3789.32 v2(5484.8,3808.02) ; v2(5228.89,4256.84) 5228.89,4268.65 5243.66,4283.41 5243.66,4299.16 U2.F3@5247.59,4303.1
  Bottom Layer w6: v2@5228.89,4259.79 5228.89,4270.62 5238.74,4280.46 5254.48,4280.46 5309.6,4225.34 5448.38,4225.34 5516.3,4157.43 5516.3,3817.86 5506.45,3808.02 v2(5484.8,3808.02)